# Altium PCB ECSE_Comp.PcbDoc
Units mm, origin at the board's own origin, x right, y up, seen from the top; angles counter-clockwise.
Board outline 48.01 x 50.93 mm, 2 copper layers (Top Layer, Bottom Layer); 17 components, 18 nets, 73 pads, 0 vias.
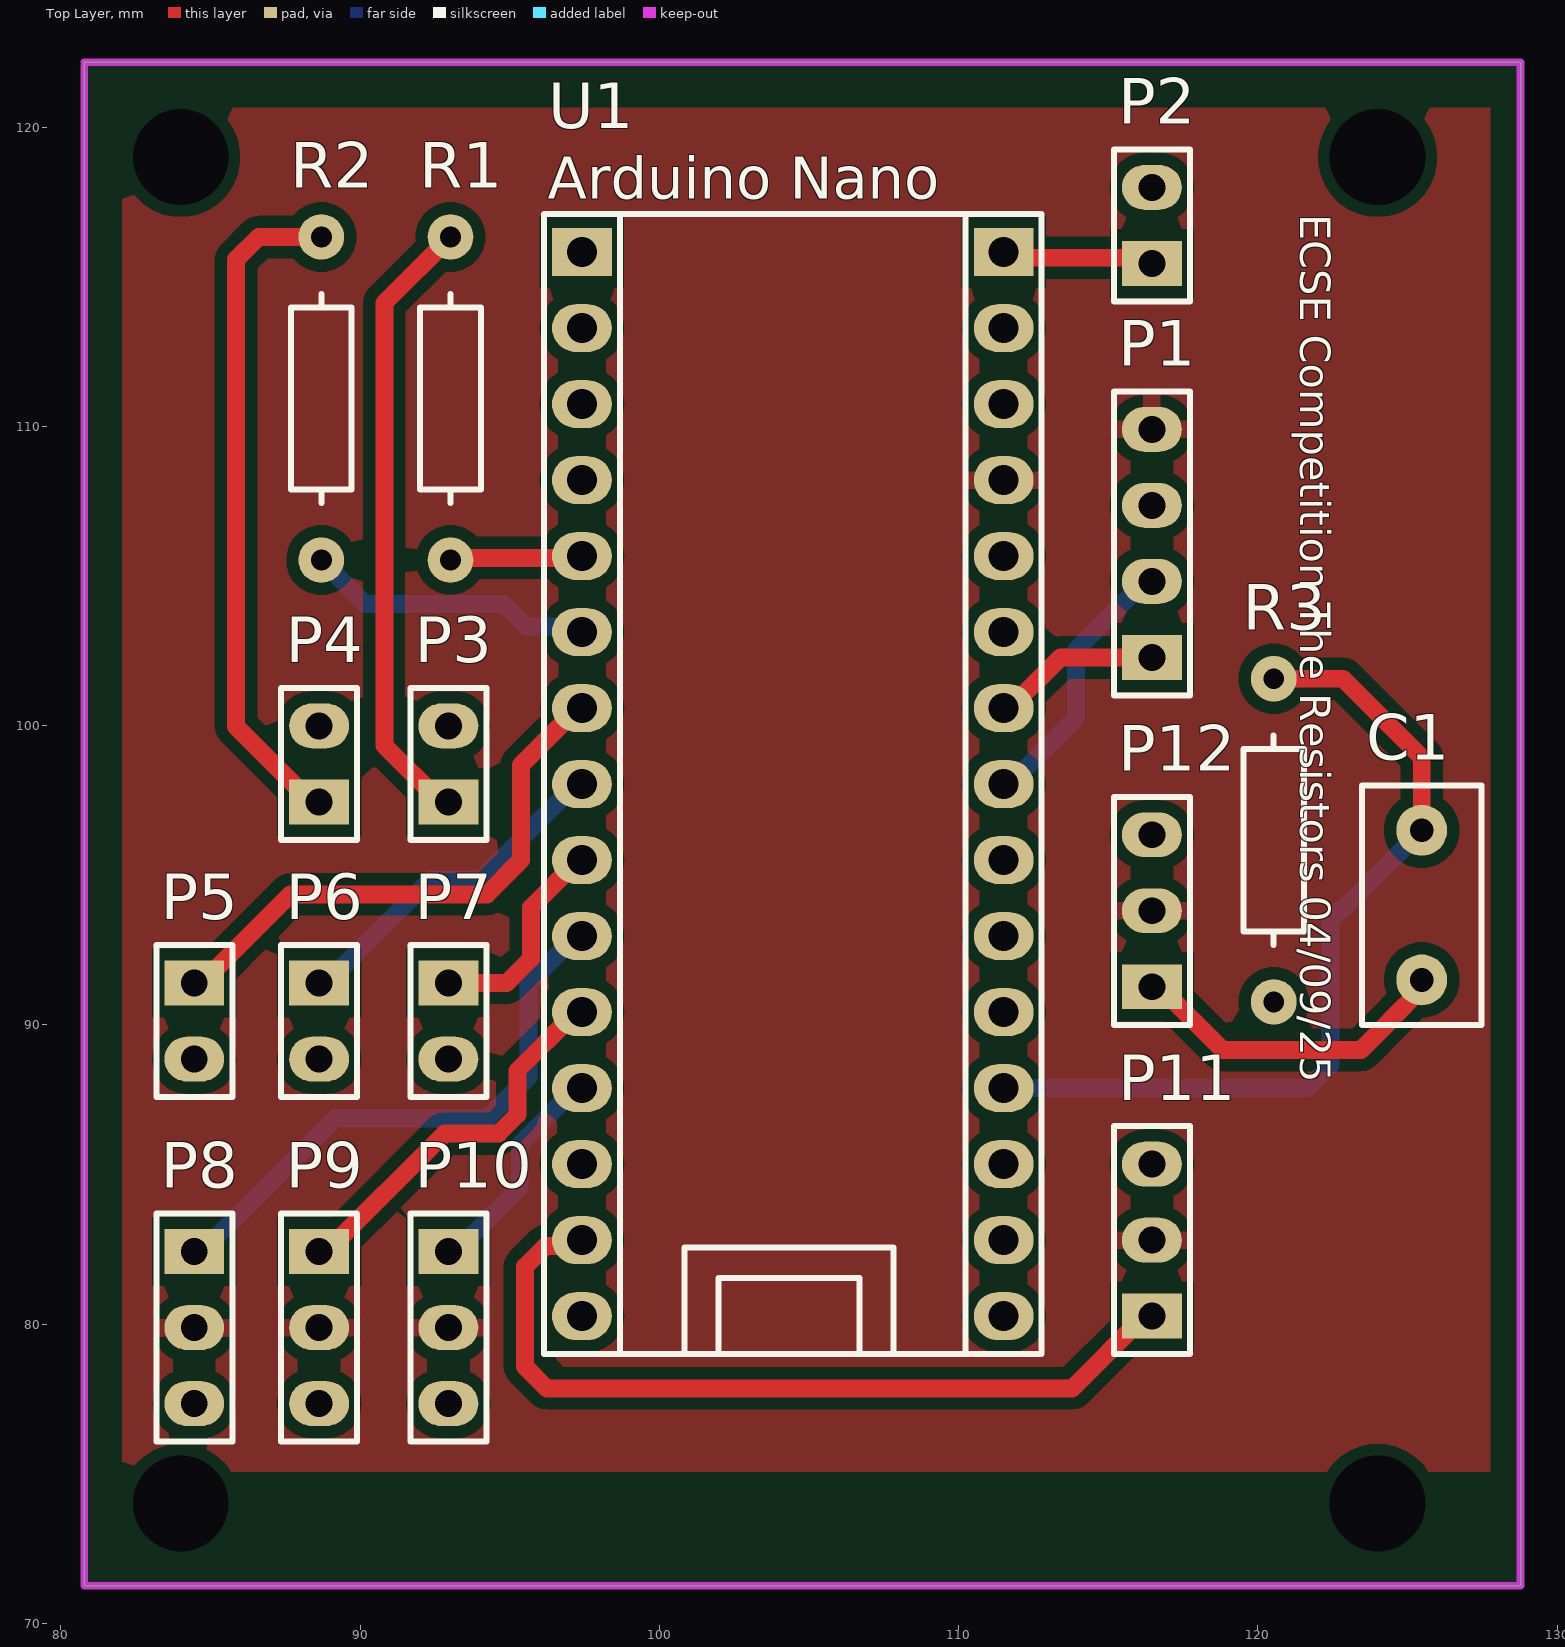
[diagram p0: Top Layer view]
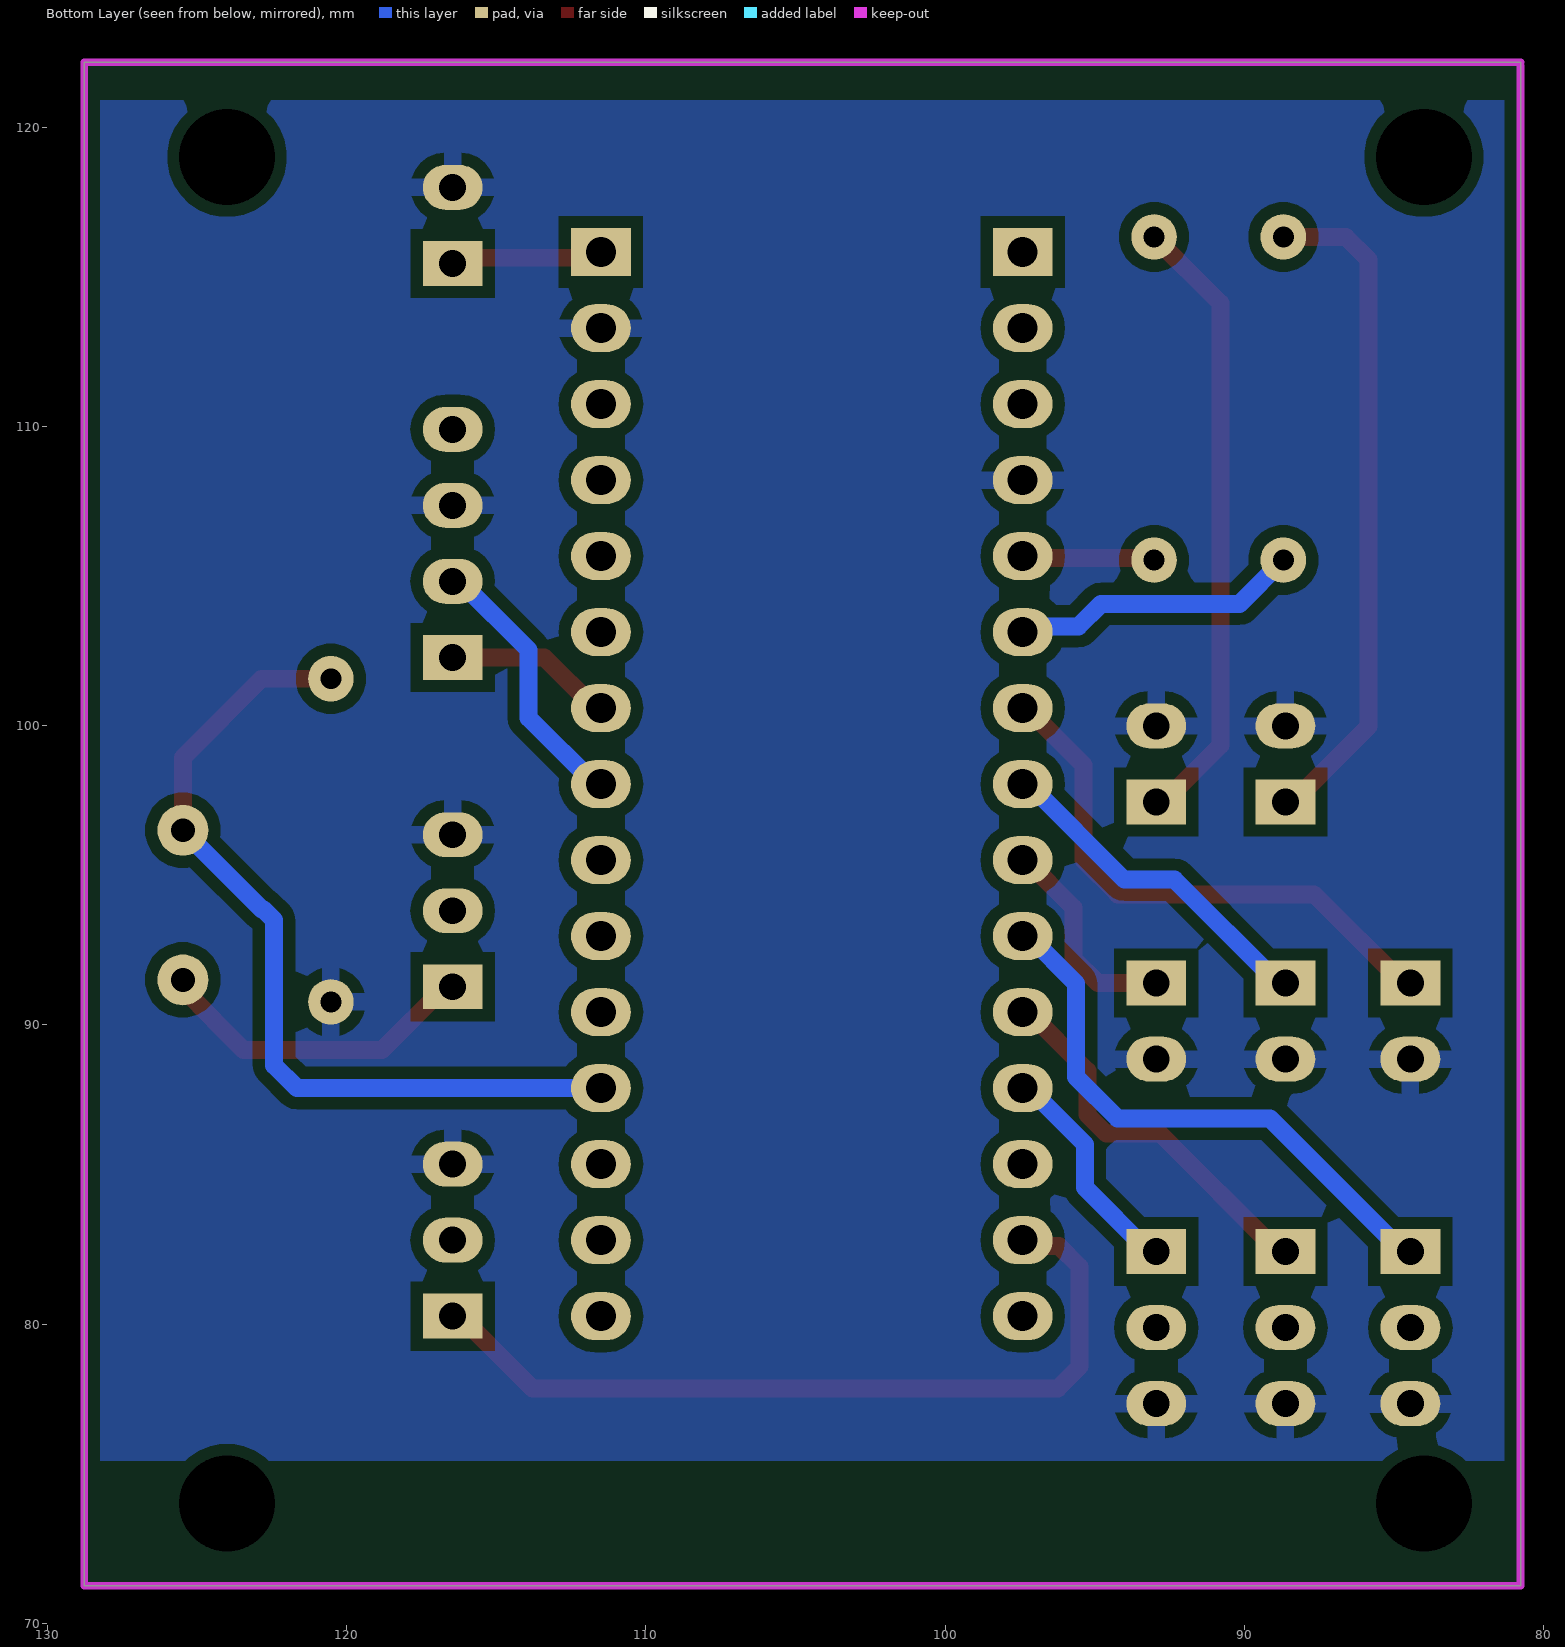
[diagram p1: Bottom Layer view, seen from below]

## Layer stack, top to bottom
Top Solder: solder mask 0.0102, Solder Resist, Dk 3.5
Top Layer: signal copper 0.0356
Dielectric 1: dielectric 0.32, FR-4, Dk 4.8
Bottom Layer: signal copper 0.0356
Bottom Solder: solder mask 0.0102, Solder Resist, Dk 3.5

## Board outline
80.772,71.247 80.772,122.174 128.778,122.174 128.778,71.247

## Design rules (kind name [scope] priority, off if disabled: settings)
Clearance [All] p1: gap=0.4 ignorepadtopadclearanceinfootprint=FALSE
Height [All] p1: minheight=0 maxheight=20 prefheight=12.7
HoleSize [All] p1: absolutevalues=TRUE maxlimit=10 minlimit=0.4 maxpercent=80.000 minpercent=20.000
PolygonConnect [All] p1: connectstyle=Relief reliefconductorwidth=0.6 reliefentries=4 polygonreliefangle="90 Angle" airgapwidth=0.4
RoutingVias [All] p1: holewidth=0.711 width=1.27 viastyle="Through Hole" minholewidth=0.711 minwidth=1.27 maxholewidth=0.711 maxwidth=1.27
SilkToSilkClearance [All] p1: silktosilkclearance=0.1
SilkToSolderMaskClearance [IsPad] p1: minsilkscreentomaskgap=0.1 clearancetoexposedcopper=TRUE
SolderMaskExpansion [All] p1: expansion=0.102 istentingtop=FALSE
SupplyNets "Schematic Supply Nets_23" [InNet('LED1')] p1: voltage=0.000
SupplyNets "Schematic Supply Nets_22" [InNet('LED2')] p2: voltage=0.000
SupplyNets "Schematic Supply Nets_21" [InNet('SERVO2')] p3: voltage=0.000
SupplyNets "Schematic Supply Nets_20" [InNet('SERVO1')] p4: voltage=0.000
SupplyNets "Schematic Supply Nets_19" [InNet('SERVO3')] p5: voltage=0.000
SupplyNets "Schematic Supply Nets_18" [InNet('BUTT2')] p6: voltage=0.000
SupplyNets "Schematic Supply Nets_4" [InNet('BUTT3')] p7: voltage=0.000
SupplyNets "Schematic Supply Nets_2" [InNet('BUTT1')] p8: voltage=0.000
SupplyNets "Schematic Supply Nets_16" [InNet('SPEAK')] p9: voltage=0.000
SupplyNets "Schematic Supply Nets_14" [InNet('VCC')] p10: voltage=0.000
SupplyNets "Schematic Supply Nets_10" [InNet('HUSKY1')] p11: voltage=0.000
SupplyNets "Schematic Supply Nets_6" [InNet('Vsupply')] p12: voltage=0.000
SupplyNets "Schematic Supply Nets" [InNet('HUSKY2')] p13: voltage=0.000
SupplyNets "Schematic Supply Nets_8" [InNet('GND')] p14: voltage=0.000
SupplyNets "Schematic Supply Nets_5" [InNet('MICout')] p15: voltage=0.000
SupplyNets "Schematic Supply Nets_1" [InNet('MICfilt')] p16: voltage=0.000
Width [All] p1: maxlimit=10 minlimit=0.4 preferedwidth=0.6
26 further rules are at their usual default settings.

## Classes and differential pairs
component class ECSE_Comp: C1 P1 P3 P4 P5 P6 P7 P8 P9 P10 P11 P12 R1 R2 R3 U1

## Components (designator, comment, footprint, x,y, rotation, side; value= is the part's Value field where it differs from the comment)
C1 "*" CCAP-5P0 125.476,94.001 r90 top
P1 "Header 4" ece-HDR1X4 116.459,102.277 r90 top
P2 "Header 2" ece-HDR1X2 116.459,115.443 r90 top
P3 "Header 2" ece-HDR1X2 92.946,97.446 r90 top
P4 "Header 2" ece-HDR1X2 88.628,97.446 r90 top
P5 "Header 2" ece-HDR1X2 84.455,91.395 r270 top
P6 "Header 2" ece-HDR1X2 88.628,91.395 r270 top
P7 "Header 2" ece-HDR1X2 92.946,91.395 r270 top
P8 "Header 3" ece-HDR1X3 84.455,82.423 r270 top
P9 "Header 3" ece-HDR1X3 88.628,82.423 r270 top
P10 "Header 3" ece-HDR1X3 92.946,82.423 r270 top
P11 "Header 3" ece-HDR1X3 116.459,80.264 r90 top
P12 "Header 3" ece-HDR1X3 116.459,91.271 r90 top
R1 "*" AXIAL-0.4 93.019,110.93 r90 top
R2 "*" AXIAL-0.4 88.701,110.93 r90 top
R3 "*" AXIAL-0.4 120.53,96.164 r90 top
U1 "Arduino Nano" PCBComponent_1 104.267,97.028 r90 top

## Footprints (in the part's own frame and the unit in brackets; to place one, negate y for a bottom-side part, rotate by r counter-clockwise, add the part's x,y. Pads: shape width x height; smd on the part's side, far side on the other; paste and mask are expansions set on the pad)
AXIAL-0.4 [mm]
  round 1.524 hole 0.7: 1(-5.4,0) 2(5.4,0)
  silkscreen extent -3.5,-1.02 3.5,1.02, body extent -5.7,-1.3 5.7,1.3, height 2.7
CCAP-5P0 [mm]
  round 1.7 hole 0.8: 1(-2.5,0) 2(2.5,0)
  silkscreen extent -4,-2 4,2, body extent -3.25,-1.5 3.25,1.5, height 6.5
ece-HDR1X2 [mm] "Header 2 way"
  rect 1.5x2 hole 0.9: 1(0,0)
  oval 1.5x2 hole 0.9: 2(2.54,0)
  silkscreen extent -1.27,-1.27 3.81,1.27
ece-HDR1X3 [mm] "Header 3 way"
  rect 1.5x2 hole 0.9: 1(0,0)
  oval 1.5x2 hole 0.9: 2(2.54,0) 3(5.08,0)
  silkscreen extent -1.27,-1.27 6.35,1.27
ece-HDR1X4 [mm] "Header 4 way"
  rect 1.5x2 hole 0.9: 1(0,0)
  oval 1.5x2 hole 0.9: 2(2.54,0) 3(5.08,0) 4(7.62,0)
  silkscreen extent -1.27,-1.27 8.89,1.27
PCBComponent_1 [mm]
  rect 1.6x2 hole 1: 1(18.796,6.858) 30(18.796,-7.239)
  oval 1.6x2 hole 1: 2(16.256,6.858) 3(13.716,6.858) 4(11.176,6.858) 5(8.636,6.858) 6(6.096,6.858) 7(3.556,6.858) 8(1.016,6.858) 9(-1.524,6.858) 10(-4.064,6.858) 11(-6.604,6.858) 12(-9.144,6.858) 13(-11.684,6.858) 14(-14.224,6.858) 15(-16.764,6.858) 16(-16.764,-7.239) 17(-14.224,-7.239) 18(-11.684,-7.239) 19(-9.144,-7.239) 20(-6.604,-7.239) 21(-4.064,-7.239) 22(-1.524,-7.239) 23(1.016,-7.239) 24(3.556,-7.239) 25(6.096,-7.239) 26(8.636,-7.239) 27(11.176,-7.239) 28(13.716,-7.239) 29(16.256,-7.239)
  silkscreen extent -18.03,-8.51 20.07,8.13

## Part data
C1: library part CerCap_TH_5P0, "TH ceramic capacitor with 5mm pitch"
P1: "Header, 4-Pin", LatestRevisionDate=17-Jul-2002, LatestRevisionNote="Re-released for DXP Platform.", Publisher="Altium Limited"
P2 P3 P4 P5 P6 P7: "Header, 2-Pin", LatestRevisionDate=17-Jul-2002, LatestRevisionNote="Re-released for DXP Platform.", Publisher="Altium Limited"
P8 P9 P10 P11 P12: "Header, 3-Pin", LatestRevisionDate=17-Jul-2002, LatestRevisionNote="Re-released for DXP Platform.", Publisher="Altium Limited"
R1 R2 R3: library part Res_TH_0AX4, "Through hole resistor", ComponentLink1Description=http://www.royalohm.com/pdf/product2017/PrecisionMetalMF.pdf, LatestRevisionDate=17-Jul-2002, LatestRevisionNote="Re-released for DXP Platform.", PackageReference=AXIAL-0.4, Published=8-Jun-2000, Publisher="Altium Limited"
U1: library part Component_1

## Free pads (board coordinates)
  round 1.524 hole 3.2: 2(84,119) 3(124,119) 4(124,74) 5(84,74)

## Nets (pads, with @x,y where several pads share a name; then routed paths per layer and width w, separated by ;. In a path a pad name is that pad's centre, name@x,y a point inside that pad or via, vN(x,y) a via of type N, cw(c..) or ccw(c..) an arc to the next point about the centre after c; other vN are vias at no path point)
BUTT1: P8.1 U1.10 | length 19.4
  Top Layer w0.6: P8.1 P8.1@84.705,82.423
  Bottom Layer w0.6: P8.1 84.705,82.423 89.15,86.868 94.234,86.868 95.626,88.26 95.626,91.381 97.209,92.964 U1.10
BUTT2: P9.1 U1.11 | length 13
  Top Layer w0.6: P9.1 88.878,82.423 92.815,86.36 94.615,86.36 95.25,86.995 95.25,88.465 97.209,90.424 U1.11
BUTT3: P10.1 U1.12 | length 8
  Top Layer w0.6: P10.1 P10.1@93.196,82.423 ; U1.12@97.209,87.884 U1.12
  Bottom Layer w0.6: P10.1 93.196,82.423 95.332,84.559 95.332,86.007 97.209,87.884 U1.12
GND: P1.3 P2.2 P3.2 P4.2 P5.2 P6.2 P7.2 P8.3 P9.3 P10.3 P11.3 P12.3 R3.1 U1.4 U1.29
HUSKY1: P1.1 U1.24 | length 5.7
  Top Layer w0.6: U1.24 111.706,100.584 113.399,102.277 P1.1
HUSKY2: P1.2 U1.23 | length 10.3
  Top Layer w0.6: U1.23@111.706,98.044 U1.23 U1.23@111.887,98.044 ; P1.2@116.709,104.817 P1.2 P1.2@116.798,104.817
  Bottom Layer w0.6: U1.23 111.706,98.044 113.919,100.257 113.919,102.527 116.209,104.817 P1.2
LED1: R1.1 U1.5 | length 4.4
  Top Layer w0.6: R1.1 93.085,105.597 97.342,105.597 U1.5
LED2: R2.1 U1.6 | length 9.7
  Bottom Layer w0.6: R2.1 90.163,104.068 94.797,104.068 95.55,103.315 97.218,103.315 U1.6
MICfilt: C1.2 R3.2 U1.19 | length 29
  Top Layer w0.6: R3.2 122.845,101.564 125.476,98.933 C1.2
  Bottom Layer w0.6: U1.19 121.666,87.884 122.428,88.646 122.428,93.502 122.779,93.853 122.828,93.853 125.349,96.374 125.349,96.52 125.368,96.501 C1.2
MICout: C1.1 P12.1 | length 11.1
  Top Layer w0.6: P12.1 116.709,91.271 118.826,89.154 123.444,89.154 124.417,90.127 124.417,90.144 125.476,91.203 C1.1
NetP3_1: P3.1 R1.2 | length 20.8
  Top Layer w0.6: P3.1 92.696,97.446 90.805,99.337 90.805,114.117 R1.2
NetP4_1: P4.1 R2.2 | length 22.6
  Top Layer w0.6: P4.1 88.378,97.446 85.852,99.972 85.852,115.57 86.612,116.33 R2.2
SERVO1: P5.1 U1.7 | length 18.8
  Top Layer w0.6: P5.1 84.705,91.395 87.671,94.361 94.234,94.361 95.377,95.504 95.377,98.679 97.282,100.584 U1.7 U1.7@97.209,100.584
SERVO2: P6.1 U1.8 | length 12.2
  Top Layer w0.6: P6.1 P6.1@88.878,91.395 ; U1.8@97.209,98.044 U1.8
  Bottom Layer w0.6: P6.1@88.519,91.186 88.628,91.295 P6.1 88.878,91.395 92.332,94.849 94.014,94.849 97.209,98.044 U1.8
SERVO3: P7.1 U1.9 | length 7.2
  Top Layer w0.6: P7.1 94.899,91.395 95.709,92.205 95.709,93.914 97.299,95.504 U1.9
SPEAK: P11.1 U1.14 | length 27.9
  Top Layer w0.6: U1.14 97.218,82.613 96.202,82.613 95.504,81.915 95.504,78.583 96.236,77.851 113.796,77.851 116.209,80.264 P11.1
VCC: P1.4 P8.2 P9.2 P10.2 P11.2 P12.2 U1.27
Vsupply: P2.1 U1.30 | length 5.3
  Top Layer w0.6: U1.30@111.706,115.824 U1.30 111.697,115.633 116.268,115.633 P2.1
pads on no net: U1.1 U1.2 U1.3 U1.13 U1.15 U1.16 U1.17 U1.18 U1.20 U1.21 U1.22 U1.25 U1.26 U1.28

## Polygon pours and split planes (outlines as drawn)
VCC on Top Layer "VCC_L01_P000" (solid, pour order 0): 82.042,120.646 82.042,75.057 127.762,75.057 127.762,120.646
GND on Bottom Layer "GND_L02_P001" (solid, pour order 1): 80.899,120.904 80.899,75.438 128.778,75.438 128.778,120.904

## Keep-outs
Keep-Out Layer:
  lines w0.254: 80.772,122.047 80.772,71.247 128.778,71.247 128.778,122.174 80.772,122.174

## Silkscreen, mask and mechanical layers (free items; w line width, h text height)
Top Overlay:
  text "ECSE Competition The Resistors 04/09/25" at 121.412,117.094 h1.02 r270
Mechanical 1:
  the board outline again, w0.254